# Altium PCB PCB_Controller.PcbDoc
Units mil, origin at the board's own origin, x right, y up, seen from the top; angles counter-clockwise.
Board outline 1106.25 x 1062.5 mil, 2 copper layers (Top Layer, Bottom Layer), stack 61.756 mil thick; 10 components, 29 nets, 91 pads, 41 vias.
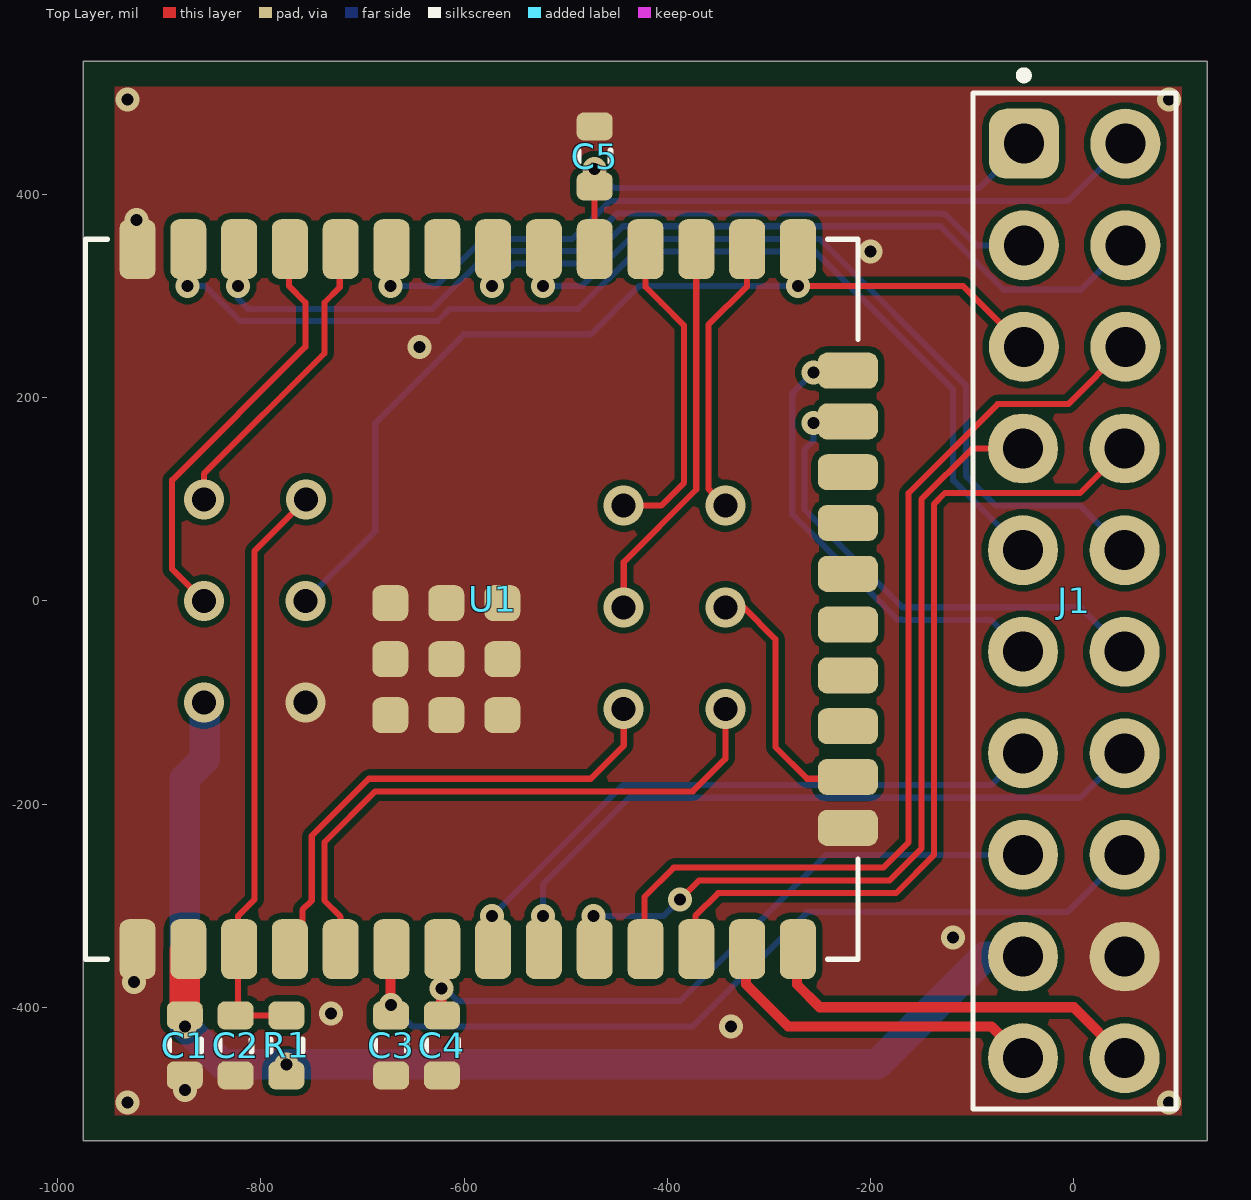
[diagram p0: Top Layer view]
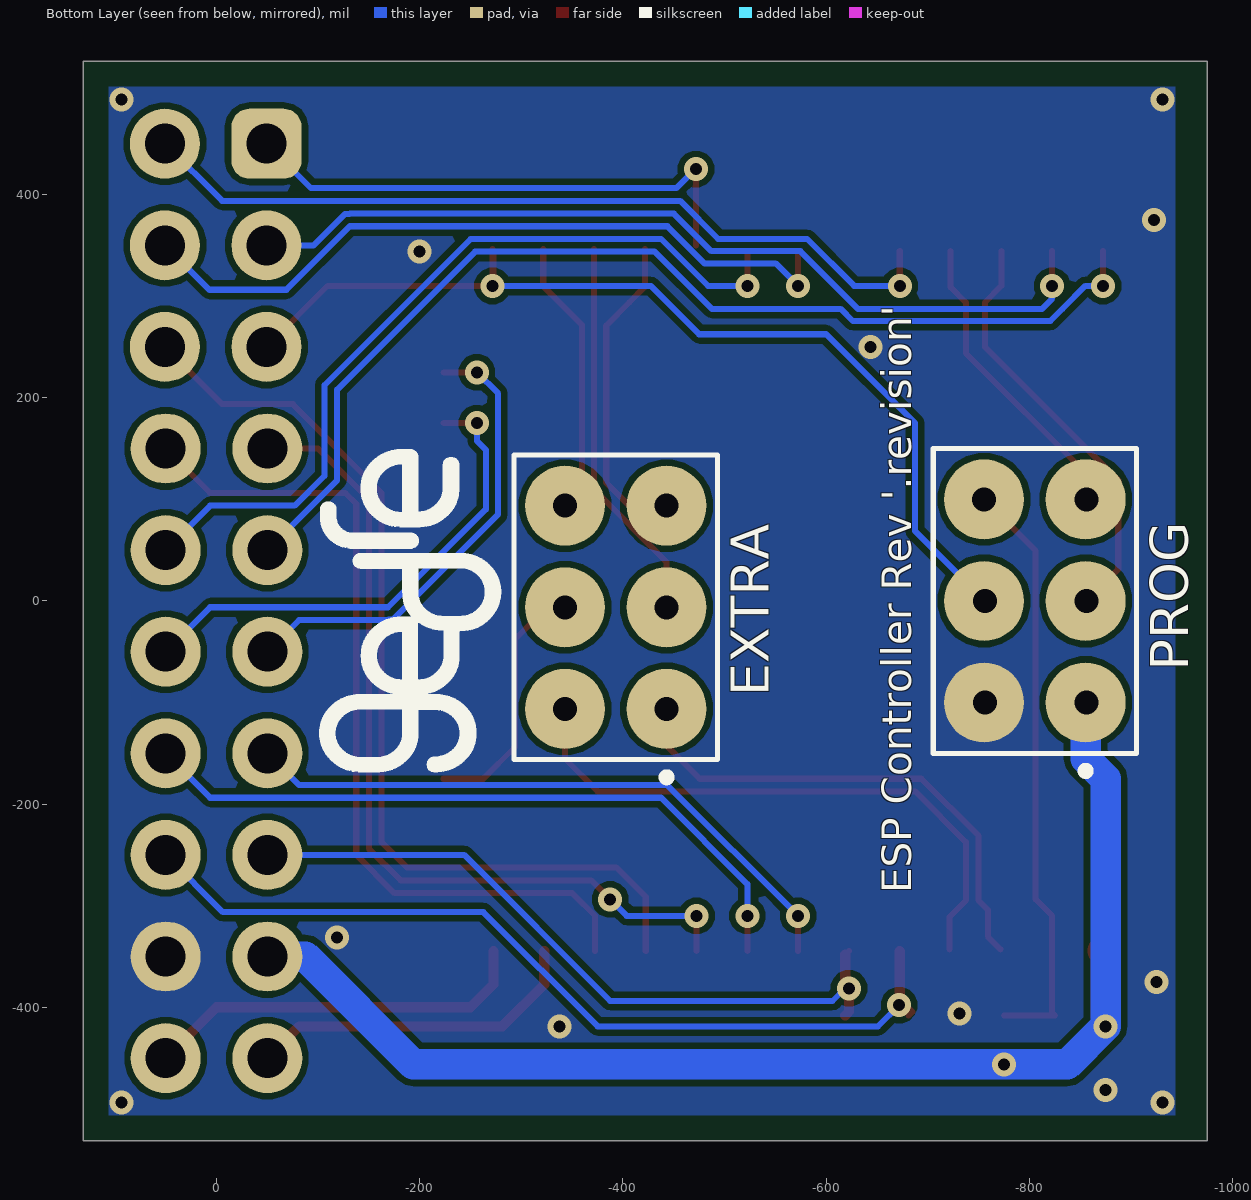
[diagram p1: Bottom Layer view, seen from below]

## Layer stack, top to bottom
Top Solder: solder mask 1, SM-001, Dk 4
Top Layer: signal copper 1.378
Dielectric 1: core 59, Core-043, Dk 4.3
Bottom Layer: signal copper 1.378
Bottom Solder: solder mask 1, SM-001, Dk 4

## Board outline
-975,-531.25 -975,531.25 131.25,531.25 131.25,-531.25

## Design rules (kind name [scope] priority, off if disabled: settings)
Clearance [All] p1: gap=6 ignorepadtopadclearanceinfootprint=FALSE
PolygonConnect [All] p1: connectstyle=Direct reliefconductorwidth=10 reliefentries=4 polygonreliefangle="90 Angle" airgapwidth=10
RoutingVias [All] p1: holewidth=28 width=50 viastyle="Through Hole" minholewidth=28 minwidth=50 maxholewidth=28 maxwidth=50
SolderMaskExpansion [All] p1: expansion=0 istentingtop=FALSE
SupplyNets "Schematic Supply Nets_1" [InNet('3V3')] p1: voltage=0.000
SupplyNets "Schematic Supply Nets" [InNet('GND')] p2: voltage=0.000
Width [All] p1: maxlimit=50 minlimit=6 preferedwidth=10
30 further rules are at their usual default settings.

## Components (designator, comment, footprint, x,y, rotation, side; value= is the part's Value field where it differs from the comment)
C1 "1u 16V" CAP_SMD_0603 -875,-437.5 r270 top
C2 "1u 16V" CAP_SMD_0603 -825,-437.5 r270 top
C3 "10n 16V" CAP_SMD_0603 -671.88,-437.5 r270 top
C4 "10n 16V" CAP_SMD_0603 -621.88,-437.5 r270 top
C5 "4.7u 16V" CAP_SMD_0603 -471.56,437.5 r90 top
EXTRA "Header 6P 3x2" CON_PTH_6P_HEADER_3x2_2.54mm -393.75,-6.25 r90 bottom
J1 "Header 20P 10x2" CON_PTH_20P_HEADER_10X2_2.54MM 0,0 r270 top
PROG "Header 6P 3x2" CON_PTH_6P_HEADER_3x2_2.54mm -806.25,0 r90 bottom
R1 "10k" RES_SMD_0603 -775,-437.5 r90 top
U1 "ESP32-WROOM-32E" IC_ESP32-WROOM-32UE-H4 -596.56,1.67 r90 top

## Footprints (in the part's own frame and the unit in brackets; to place one, negate y for a bottom-side part, rotate by r counter-clockwise, add the part's x,y. Pads: shape width x height; smd on the part's side, far side on the other; paste and mask are expansions set on the pad)
CAP_SMD_0603 [mm] "0603 Chip Capacitor, 2-Leads, Body 1,60x0,80mm, IPC Medium Density"
  rrect50% 0.7x0.9 smd paste-2539.97: 1(-0.75,0) 2(0.75,0)
  silkscreen extent -0.15,-0.4 0.15,0.4, body extent -0.85,-0.45 0.85,0.45, height 0.9
CON_PTH_6P_HEADER_3x2_2.54mm [mm] "3x2 6P PTH male pin header. 2.54mm pitch"
  round 2 smd: 1(-2.54,-1.25) 2(-2.54,1.29) 3(0,-1.25) 4(0,1.29) 5(2.54,-1.25) 6(2.54,1.29)
  silkscreen extent -4.35,-2.52 3.81,2.56
CON_PTH_20P_HEADER_10X2_2.54MM [mm] "10x2 20P PTH male pin header. 2.54mm pitch"
  rrect50% 1.75x1.75 hole 1: 1(-11.43,-1.25)
  round 1.75 hole 1: 2(-11.43,1.29) 3(-8.89,-1.25) 4(-8.89,1.29) 5(-6.35,-1.25) 6(-6.35,1.29) 7(-3.81,-1.27) 8(-3.81,1.27) 9(-1.27,-1.27) 10(-1.27,1.27) 11(1.27,-1.27) 12(1.27,1.27) 13(3.81,-1.27) 14(3.81,1.27) 15(6.35,-1.27) 16(6.35,1.27) 17(8.89,-1.27) 18(8.89,1.27) 19(11.43,-1.27) 20(11.43,1.27)
  silkscreen extent -13.24,-2.52 12.7,2.56, body extent -12.7,-2.54 12.7,2.54, height 8.75
IC_ESP32-WROOM-32UE-H4 [mm]
  rrect50% 1.5x0.9 smd: 1(-8.75,8.255) 2(-8.75,6.985) 3(-8.75,5.715) 4(-8.75,4.445) 5(-8.75,3.175) 6(-8.75,1.905) 7(-8.75,0.635) 8(-8.75,-0.635) 9(-8.75,-1.905) 10(-8.75,-3.175) 11(-8.75,-4.445) 12(-8.75,-5.715) 13(-8.75,-6.985) 14(-8.75,-8.255) 25(8.75,-8.255) 26(8.75,-6.985) 27(8.75,-5.715) 28(8.75,-4.445) 29(8.75,-3.175) 30(8.75,-1.905) 31(8.75,-0.635) 32(8.75,0.635) 33(8.75,1.905) 34(8.75,3.175) 35(8.75,4.445) 36(8.75,5.715) 37(8.75,6.985) 38(8.75,8.255)
  rrect50% 0.9x1.5 smd: 15(-5.715,-9.505) 16(-4.445,-9.505) 17(-3.175,-9.505) 18(-1.905,-9.505) 19(-0.635,-9.505) 20(0.635,-9.505) 21(1.905,-9.505) 22(3.175,-9.505) 23(4.445,-9.505) 24(5.715,-9.505)
  rrect50% 0.9x0.9 smd: TP(-2.9,-0.865) TP(-2.9,0.535) TP(-2.9,1.935) TP(-1.5,1.935) TP(-1.5,-0.865) TP(-1.5,0.535) TP(-0.1,1.935) TP(-0.1,0.535) TP(-0.1,-0.865)
  silkscreen extent -9,-9.75 9,9.55, body extent -9,-9.75 9,9.45, height 3.36
RES_SMD_0603 [mm] "0603 Chip Resistor, 2-Leads, Body 1,60x0,80mm, IPC Medium Density"
  rrect50% 0.7x0.9 smd: 1(-0.75,0) 2(0.75,0)
  silkscreen extent -0.15,-0.4 0.15,0.4, body extent -0.85,-0.45 0.85,0.45, height 0.45

## Part data
C1 C2 C3 C4 C5: library part CAP_SMD, "Capacitor SMD - Generic"
EXTRA PROG: library part CON_PTH_HEADER_6P_3x2, "3x2 6P PTH pin header - Generic"
J1: library part CON_PTH_HEADER_20P_10x2, "10x2 20P PTH pin header - Generic"
R1: library part RES_SMD, "Resistor SMD - Generic"
U1: library part MODULE_ESP32-WROOM-32E, "RX TXRX MOD WIFI TRACE ANT SMD", Package="SMD-44 Espressif Systems", Datasheet=https://datasheet.octopart.com/ESP32-WROOM-32E-%284MB%29-Espressif-Systems-datasheet-151884363.pd, MF="Espressif Systems", MP=ESP32-WROOM-32E

## Via types
v1: diameter 23.62, hole 11.81, Top Layer to Bottom Layer, tented both sides, 29 vias
v2: diameter 39.37, hole 23.62, Top Layer to Bottom Layer, tented both sides, 12 vias

## Nets (pads, with @x,y where several pads share a name; then routed paths per layer and width w, separated by ;. In a path a pad name is that pad's centre, name@x,y a point inside that pad or via, vN(x,y) a via of type N, cw(c..) or ccw(c..) an arc to the next point about the centre after c; other vN are vias at no path point)
3V3: C1.1 J1.17 PROG.1 R1.1 U1.2 | length 1277.4
  Top Layer w30: C1.1 -875,-344.49 U1.2@-872.5,-344.49
  Bottom Layer w30: PROG.1 -855.46,-155.46 -875,-175 v1(-875,-418.75) -837.5,-456.25 v1(-775,-456.25) -193.75,-456.25 -87.5,-350 J1.17
  other v2: -856.25,-100
ADC_VLEDN: C4.1 J1.15 U1.7 | length 700.1
  Top Layer w6: U1.7@-622.5,-344.49 U1.7@-618.75,-348.24
  Top Layer w10: v1(-622.5,-381.25) -622.5,-404.22 C4.1@-618.75,-407.97 ; v1@-618.75,-381.25 U1.7@-618.75,-348.24
  Bottom Layer w6: v1@-618.75,-381.25 -606.25,-393.75 -387.5,-393.75 -243.75,-250 J1.15
ADC_VLEDP: C3.1 J1.16 U1.6 | length 872.9
  Top Layer w6: C3.1@-681.25,-407.97 -684.79,-404.43 C3.1@-681.25,-400.89 ; v1@-677.83,-391.98 v1(-671.88,-397.94)
  Top Layer w10: C3.1@-672.5,-398.56 U1.6@-672.5,-344.49
  Bottom Layer w6: v1(-671.88,-397.94) -651.06,-418.75 -375,-418.75 -262.5,-306.25 -6.25,-306.25 J1.16
CDB: J1.12 U1.23 | length 494.6
  Top Layer w6: v1(-256.25,175) U1.23@-223.29,175
  Bottom Layer w6: v1(-256.25,175) -256.25,157.55 -265.06,148.74 -265.06,90.06 -168.75,-6.25 6.25,-6.25 J1.12
CLK: J1.5 PROG.4 U1.25 | length 992.4
  Top Layer w6: v1@-272.5,310 U1.25@-272.5,343.75 ; U1.25 v1(-271.56,310) -109.21,310 J1.5
  Bottom Layer w6: v2(-756.25,0) -687.5,68.75 -687.5,175 -600,262.5 -475,262.5 -427.5,310 v1(-271.56,310)
DIM: J1.14 U1.9 | length 691.6
  Top Layer w6: U1.9@-522.5,-344.49 v1(-522.5,-310)
  Bottom Layer w6: v1(-522.5,-310) -522.5,-278.75 -437.5,-193.75 6.25,-193.75 J1.14
ESP_EN: C2.1 PROG.6 R1.2 U1.3 | length 586.8
  Top Layer w6: R1.2 C2.1 -822.5,-405.47 -822.5,-344.49 -822.5,-310 -806.25,-293.75 -806.25,49.21 v2(-755.46,100)
ESP_RX: PROG.5 U1.34 | length 299.9
  Top Layer w6: v2(-856.25,100) -856.25,125 -737.5,243.75 -737.5,293.75 -722.5,308.75 U1.34@-722.5,344.49
ESP_TX: PROG.3 U1.35 | length 418.5
  Top Layer w6: v2(-856.25,0) -887.5,31.25 -887.5,118.75 -756.25,250 -756.25,293.75 -772.5,310 U1.35@-772.5,344.49
EXTRA_1: EXTRA.1 U1.4 | length 500.5
  Top Layer w6: U1.4 -759.18,-330.44 -759.18,-304.11 -750,-294.93 -750,-231.25 -693.75,-175 -475.48,-175 -442.96,-142.49 v2(-442.96,-106.25)
EXTRA_2: EXTRA.2 U1.5 | length 589.7
  Top Layer w6: U1.5 -721.56,-310.93 -737.5,-294.98 -737.5,-237.5 -687.5,-187.5 -375,-187.5 -342.96,-155.46 v2(-342.96,-106.25)
EXTRA_3: EXTRA.4 U1.16 | length 251.8
  Top Layer w6: v2(-342.96,-6.25) -325,-6.25 -293.75,-37.5 -293.75,-143.75 -262.5,-175 U1.16@-223.29,-175
EXTRA_4: EXTRA.6 U1.26 | length 275
  Top Layer w6: v2(-342.96,93.75) -359.56,110.34 -359.56,271.69 -321.56,309.69 U1.26
EXTRA_5: EXTRA.3 U1.27 | length 382
  Top Layer w6: v2(-442.96,-6.25) -442.96,38.29 -371.56,109.69 U1.27
EXTRA_6: EXTRA.5 U1.28 | length 314.3
  Top Layer w6: v2(-442.96,93.75) -406.25,93.75 -383.56,116.44 -383.56,271.06 -406.25,293.75 -421.56,309.06 U1.28
GND: C1.2 C2.2 C3.2 C4.2 C5.2 J1.18 PROG.2 U1.1 U1.15 U1.38 U1.TP
  other v1: -931.25,-493.75 93.75,-493.75 -875,-481.25 -337.5,-418.75 -731.25,-406.25 -925,-375 -118.75,-331.25 -643.75,250 -200,343.75 -922.5,375 -931.25,493.75 93.75,493.75
  other v2: -756.25,-100
LED_1: J1.19 U1.13 | length 335.5
  Top Layer w10: U1.13@-322.5,-344.49 -322.5,-377.5 -281.25,-418.75 -81.25,-418.75 J1.19
LED_2: J1.20 U1.14 | length 385.5
  Top Layer w10: U1.14@-272.5,-344.49 -272.5,-377.5 -250,-400 0,-400 J1.20
MDC: J1.9 U1.37 | length 1078.8
  Top Layer w6: U1.37@-872.5,344.49 v1(-872.5,310) v1@-868.75,306.25
  Bottom Layer w6: v1(-872.5,310) -855.17,310 -832.64,287.47 -820.67,275.5 -626.28,275.5 -614.28,287.5 -512.5,287.5 -487.5,287.5 -431.25,343.75 -254.47,343.75 -118.75,208.03 -118.75,118.75 J1.9
MDIO: J1.10 U1.30 | length 805.3
  Top Layer w6: v1(-522.5,310) U1.30@-522.5,344.49
  Bottom Layer w6: v1(-522.5,310) -483.75,310 -437.5,356.25 -250,356.25 -106.25,212.5 -106.25,123.22 -76.78,93.75 6.25,93.75 J1.10
PHY_RESET: C5.1 J1.1 U1.29 | length 523.7
  Top Layer w6: U1.29@-471.88,350.11 -471.88,407.65 C5.1 -471.88,408.29 v1(-471.88,425)
  Bottom Layer w6: v1(-471.88,425) -471.4,425 -452.65,406.25 -92.96,406.25 J1.1
RXD0: J1.7 U1.10 | length 848.9
  Top Layer w6: U1.10@-472.5,-344.49 v1(-472.5,-310) ; v1(-387.5,-293.75) -368.75,-275 -181.25,-275 -150,-243.75 -150,100 -100,150 J1.7
  Bottom Layer w6: v1(-472.5,-310) -403.75,-310 v1(-387.5,-293.75)
RXD1: J1.6 U1.11 | length 952.1
  Top Layer w6: U1.11@-422.5,-344.49 -422.5,-291.25 -393.75,-262.5 -187.5,-262.5 -162.5,-237.5 -162.5,106.25 -75,193.75 -5.46,193.75 J1.6
RXDV: J1.8 U1.12 | length 849.9
  Top Layer w6: U1.12@-372.5,-344.49 -372.5,-310 -350,-287.5 -175,-287.5 -137.5,-250 -137.5,95.53 -126.78,106.25 6.25,106.25 J1.8
SHDN: J1.13 U1.8 | length 623.3
  Top Layer w6: U1.8@-572.5,-344.49 v1(-572.5,-310)
  Bottom Layer w6: v1(-572.5,-310) -443.75,-181.25 -81.25,-181.25 J1.13
T2P: J1.11 U1.24 | length 464.5
  Top Layer w6: v1(-256.25,225) U1.24@-223.29,225
  Bottom Layer w6: v1(-256.25,225) -277.06,204.19 -277.06,183.62 -277.06,166.38 -277.06,85.09 -173.72,-18.25 -169.25,-18.25 -168.75,-18.75 -81.25,-18.75 J1.11
TXD0: J1.4 U1.31 | length 731.4
  Top Layer w6: U1.31@-572.5,344.49 v1(-572.5,310) v1@-568.75,306.25
  Bottom Layer w6: v1(-572.5,310) -550.25,332.25 -480.25,332.25 -443.75,368.75 -131.25,368.75 -68.75,306.25 7.04,306.25 J1.4
TXD1: J1.3 U1.36 | length 881.5
  Top Layer w6: U1.36@-822.5,344.49 v1(-822.5,310) v1@-818.75,306.25
  Bottom Layer w6: v1(-822.5,310) -822.5,297.5 -812.5,287.5 -631.25,287.5 -574.5,344.25 -487,344.25 -450,381.25 -131.25,381.25 -130.75,380.75 -126.28,380.75 -95.53,350 J1.3
TXEN: J1.2 U1.33 | length 821.1
  Top Layer w6: U1.33@-672.5,344.49 v1(-672.5,310) v1@-668.75,306.25
  Bottom Layer w6: v1(-672.5,310) -627.5,310 -581.25,356.25 -493.75,356.25 -456.25,393.75 -5.46,393.75 J1.2
pads on no net: U1.17 U1.18 U1.19 U1.20 U1.21 U1.22 U1.32

## Polygon pours and split planes (outlines as drawn)
GND on Top Layer "GND_L01_P001" (solid, remove dead copper, pour order 1): 106.25,-506.25 106.25,506.25 -943.75,506.25 -943.75,-506.25
GND on Bottom Layer "GND_L02_P000" (solid, remove dead copper, pour order 0): 106.25,-506.25 106.25,506.25 -943.75,506.25 -943.75,-506.25

## Silkscreen, mask and mechanical layers (free items; w line width, h text height)
Bottom Overlay:
  drawing of 3 lines, arcs and shapes, not listed
  text "ESP Controller Rev '.revision'" at -693.75,-287.5 h50 r270
Mechanical 1:
  the board outline again, w6